# Altium PCB Copy of PCB1.PcbDoc (part 9 of 9)
Units mm, origin at the board's own origin, x right, y up, seen from the top; angles counter-clockwise.
Board outline 100 x 100 mm, 6 copper layers (Top Layer, Int1 (GND), Int2 (Sign), Int3 (Sign), Int4 (PWR), Bottom Layer), stack 1.538 mm thick; 614 components, 712 nets, 3013 pads, 501 vias.
Unrouted connection lines stored in the file: 259.
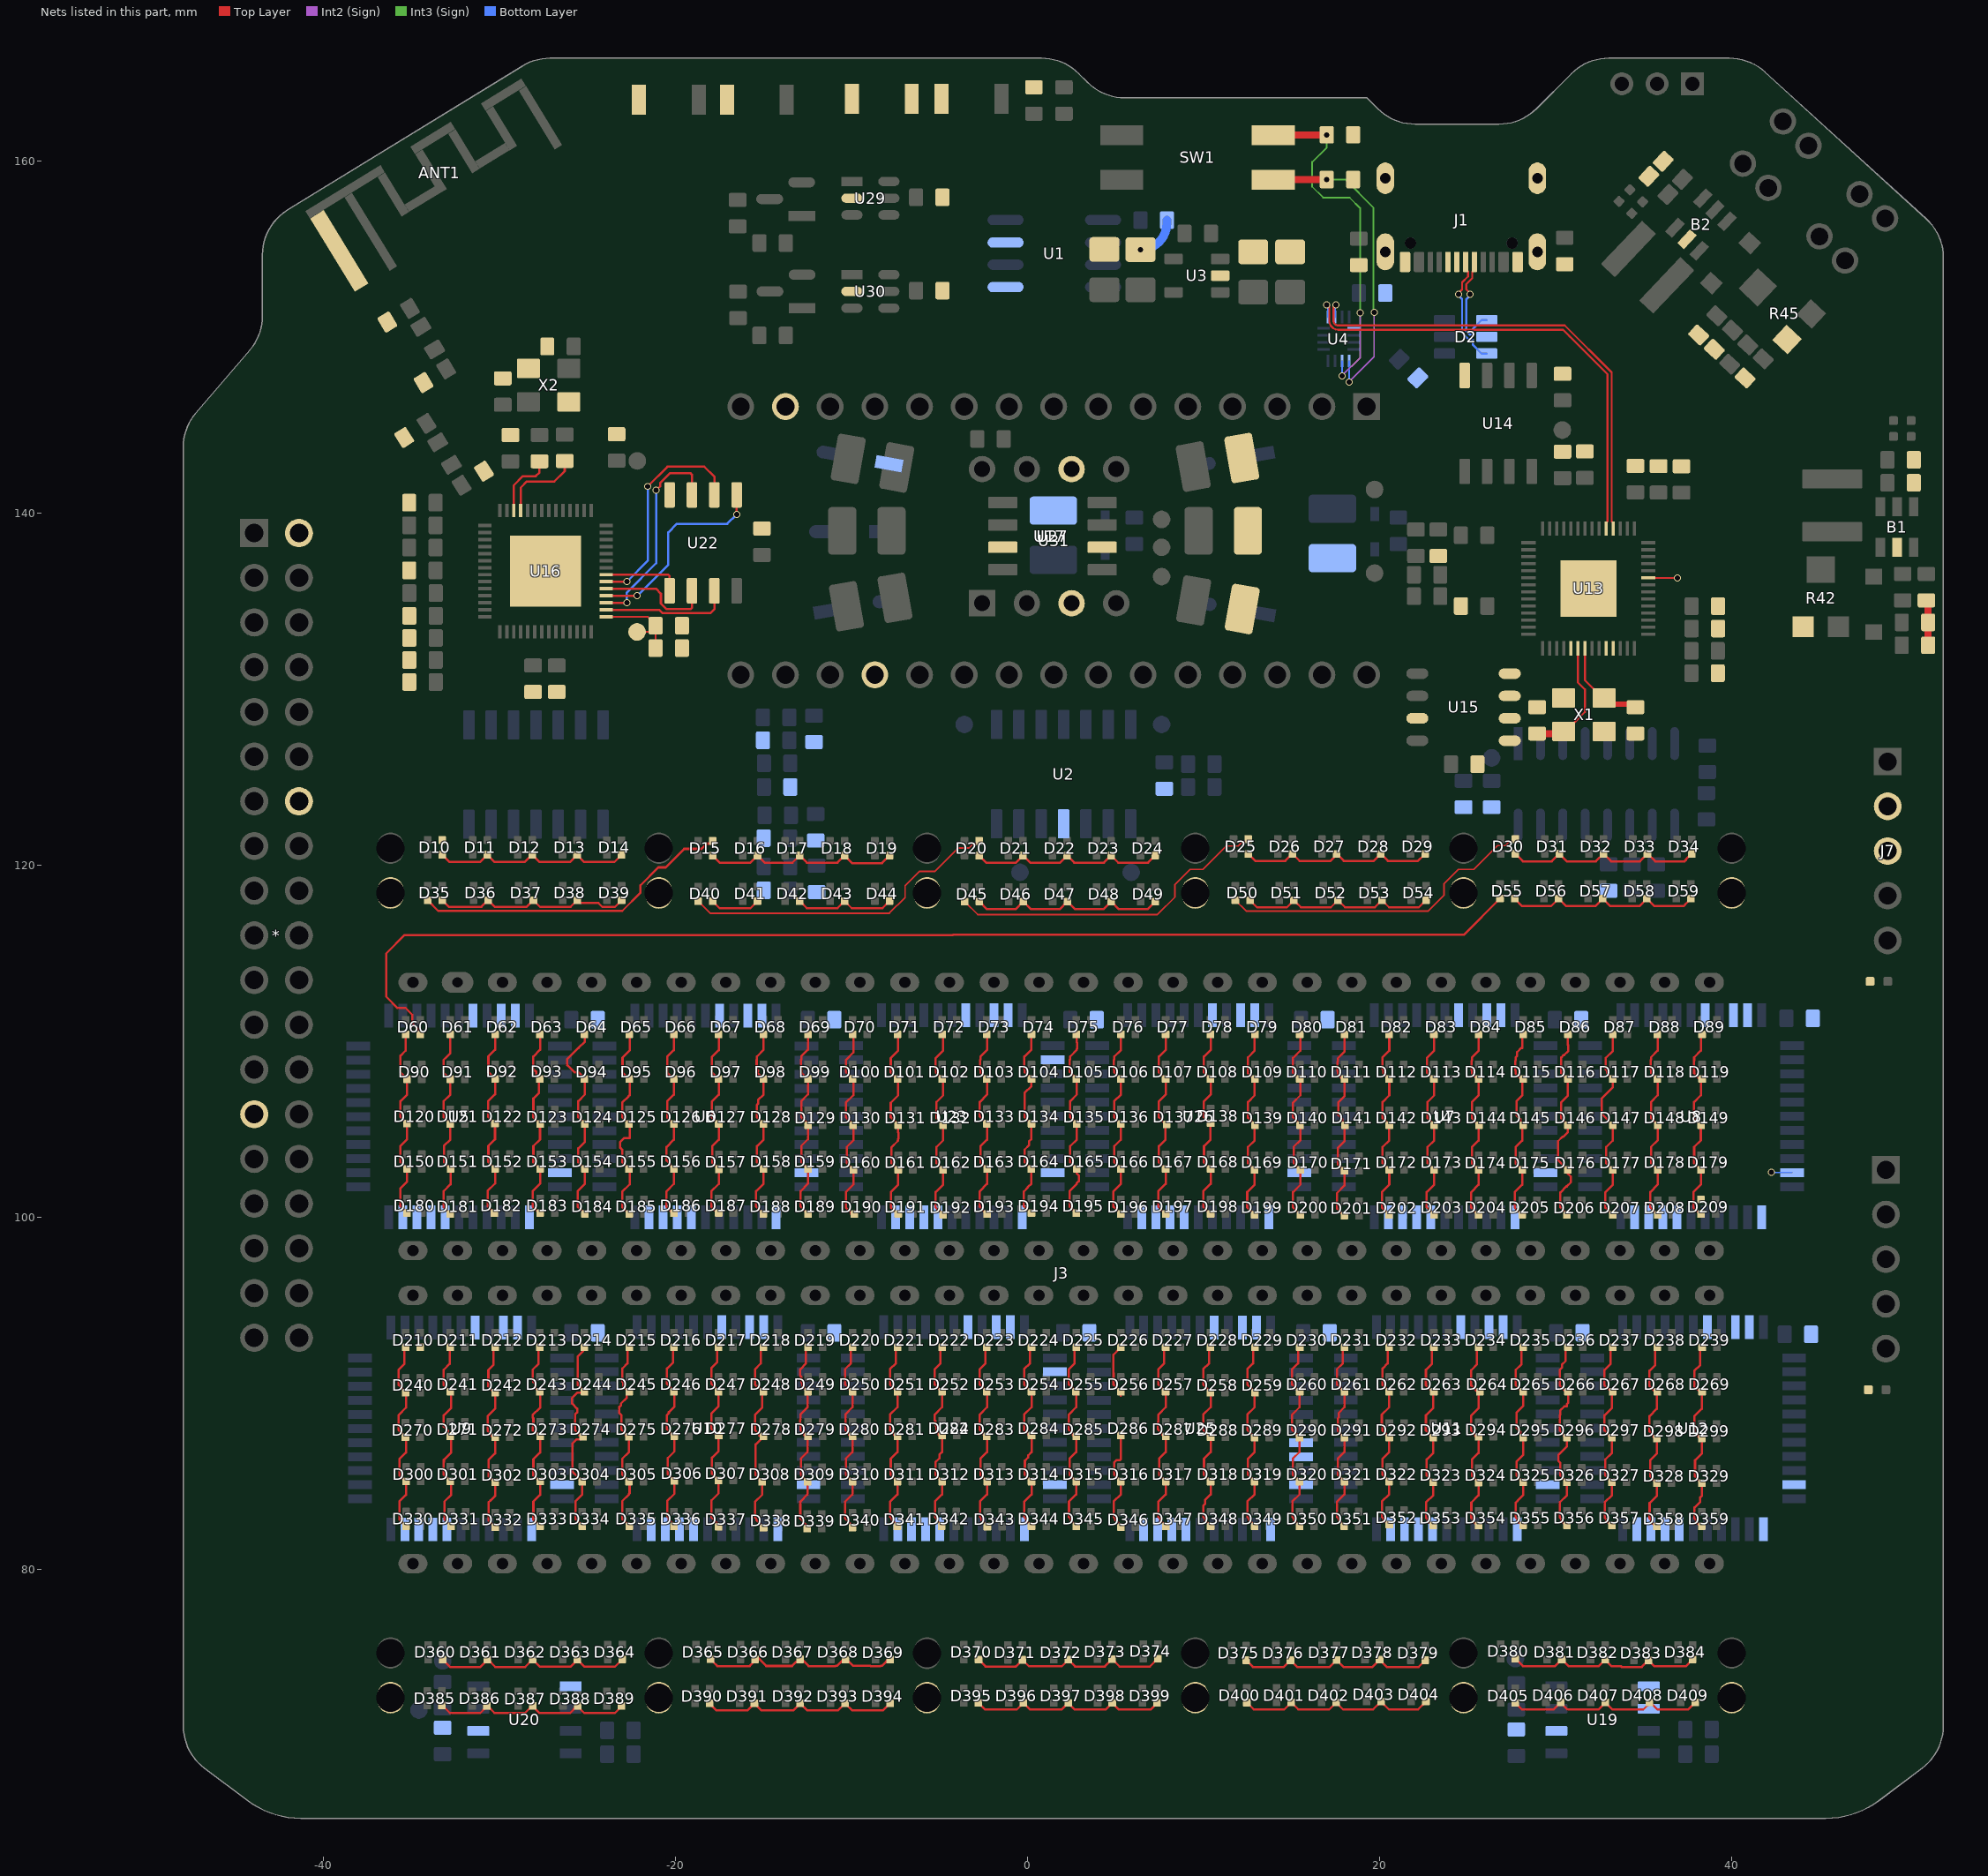
[diagram p12: the nets of this part, all layers, seen from the top]

## Via types
v1: diameter 0.4, hole 0.3, Top Layer to Bottom Layer, tented both sides, 494 vias
v2: diameter 0.4, hole 0.3, Top Layer to Bottom Layer, 5 vias
v3: diameter 0.4, hole 0.3, Top Layer to Bottom Layer, tented top, 1 vias
v4: diameter 0.6, hole 0.5, Top Layer to Bottom Layer, 1 vias

## Nets (pads, with @x,y where several pads share a name; then routed paths per layer and width w, separated by ;. In a path a pad name is that pad's centre, name@x,y a point inside that pad or via, vN(x,y) a via of type N, cw(c..) or ccw(c..) an arc to the next point about the centre after c; other vN are vias at no path point) (continued)
REF: *.2 *.14 *.27 ANT1.2 B1.2 B2.2 C1.1 C2.1 C3.1 C4.1 C5.1 C6.1 C7.1 C8.1 C9.1 C10.1 C11.1 C12.1 C13.1 C14.1 C15.1 C16.1 C17.1 C18.1 C20.1 C21.1 C23.1 C25.1 C26.1 C27.1 C28.1 C29.1 C30.1 C31.1 C32.1 C33.1 C44.1 C45.1 C46.1 C47.1 C48.1 C49.1 C50.1 C51.1 C52.1 C53.1 C54.1 C55.1 C56.1 C57.1 C58.1 C59.1 C60.1 C61.1 C62.1 C63.1 C64.1 C65.1 C66.1 C67.1 C68.1 C69.1 C70.1 C71.1 C72.1 C73.1 C74.1 C75.1 C76.1 C77.1 C78.1 C79.1 C80.1 C81.1 C82.1 C83.1 C84.1 C85.1 C86.1 D1.K D2.2 D8.1 D10.3 D11.3 D12.3 D13.3 D14.3 D15.3 D16.3 D17.3 D18.3 D19.3 D20.3 D21.3 D22.3 D23.3 D24.3 D25.3 D26.3 D27.3 D28.3 D29.3 D30.3 D31.3 D32.3 D33.3 D34.3 D35.3 D36.3 D37.3 D38.3 D39.3 D40.3 D41.3 D42.3 D43.3 D44.3 D45.3 D46.3 D47.3 D48.3 D49.3 D50.3 D51.3 D52.3 D53.3 D54.3 D55.3 D56.3 D57.3 D58.3 D59.3 D60.3 D61.3 D62.3 D63.3 D64.3 D65.3 D66.3 D67.3 D68.3 D69.3 D70.3 D71.3 D72.3 D73.3 D74.3 D75.3 D76.3 D77.3 D78.3 D79.3 D80.3 D81.3 D82.3 D83.3 D84.3 D85.3 D86.3 D87.3 D88.3 D89.3 D90.3 D91.3 D92.3 D93.3 D94.3 D95.3 D96.3 D97.3 D98.3 D99.3 D100.3 D101.3 D102.3 D103.3 D104.3 D105.3 D106.3 D107.3 D108.3 D109.3 D110.3 D111.3 D112.3 D113.3 D114.3 D115.3 D116.3 D117.3 D118.3 D119.3 D120.3 D121.3 D122.3 D123.3 D124.3 D125.3 D126.3 D127.3 D128.3 D129.3 D130.3 D131.3 D132.3 D133.3 D134.3 D135.3 D136.3 D137.3 D138.3 D139.3 D140.3 D141.3 D142.3 D143.3 D144.3 D145.3 D146.3 D147.3 D148.3 D149.3 D150.3 D151.3 D152.3 D153.3 D154.3 D155.3 D156.3 D157.3 D158.3 D159.3 D160.3 D161.3 D162.3 D163.3 D164.3 D165.3 D166.3 D167.3 D168.3 D169.3 D170.3 D171.3 D172.3 D173.3 D174.3 D175.3 D176.3 D177.3 D178.3 D179.3 D180.3 D181.3 D182.3 D183.3 D184.3 D185.3 D186.3 D187.3 D188.3 D189.3 D190.3 D191.3 D192.3 D193.3 D194.3 D195.3 D196.3 D197.3 D198.3 D199.3 D200.3 D201.3 D202.3 D203.3 D204.3 D205.3 D206.3 D207.3 D208.3 D209.3 D210.3 D211.3 D212.3 D213.3 D214.3 D215.3 D216.3 D217.3 D218.3 D219.3 D220.3 D221.3 D222.3 D223.3 D224.3 D225.3 D226.3 D227.3 D228.3 D229.3 D230.3 D231.3 D232.3 D233.3 D234.3 D235.3 D236.3 D237.3 D238.3 D239.3 D240.3 D241.3 D242.3 D243.3 D244.3 D245.3 D246.3 D247.3 D248.3 D249.3 D250.3 D251.3 D252.3 D253.3 D254.3 D255.3 D256.3 D257.3 D258.3 D259.3 D260.3 D261.3 D262.3 D263.3 D264.3 D265.3 D266.3 D267.3 D268.3 D269.3 D270.3 D271.3 D272.3 D273.3 D274.3 D275.3 D276.3 D277.3 D278.3 D279.3 D280.3 D281.3 D282.3 D283.3 D284.3 D285.3 D286.3 D287.3 D288.3 D289.3 D290.3 D291.3 D292.3 D293.3 D294.3 D295.3 D296.3 D297.3 D298.3 D299.3 D300.3 D301.3 D302.3 D303.3 D304.3 D305.3 D306.3 D307.3 D308.3 D309.3 D310.3 D311.3 D312.3 D313.3 D314.3 D315.3 D316.3 D317.3 D318.3 D319.3 D320.3 D321.3 D322.3 D323.3 D324.3 D325.3 D326.3 D327.3 D328.3 D329.3 D330.3 D331.3 D332.3 D333.3 D334.3 D335.3 D336.3 D337.3 D338.3 D339.3 D340.3 D341.3 D342.3 D343.3 D344.3 D345.3 D346.3 D347.3 D348.3 D349.3 D350.3 D351.3 D352.3 D353.3 D354.3 D355.3 D356.3 D357.3 D358.3 D359.3 D360.3 D361.3 D362.3 D363.3 D364.3 D365.3 D366.3 D367.3 D368.3 D369.3 D370.3 D371.3 D372.3 D373.3 D374.3 D375.3 D376.3 D377.3 D378.3 D379.3 D380.3 D381.3 D382.3 D383.3 D384.3 D385.3 D386.3 D387.3 D388.3 D389.3 D390.3 D391.3 D392.3 D393.3 D394.3 D395.3 D396.3 D397.3 D398.3 D399.3 D400.3 D401.3 D402.3 D403.3 D404.3 D405.3 D406.3 D407.3 D408.3 D409.3 J1.A1B12 J1.B1A12 J1.SH J3.62 J3.64 JP5.2 JP6.2 R2.2 R3.2 R5.1 R6.1 R7.1 R15.1 R23.1 R25.1 R28.1 R34.1 R42.1 R43.1 R45.1 R46.1 SW2.1 SW3.2 SW4.1 SW5.1 U1.5 U1.7 U2.11 U3.2 U4.1 U5.10 U5.12 U5.18 U5.19 U5.20 U5.21 U5.40 U5.42 U5.43 U6.10 U6.12 U6.18 U6.19 U6.20 U6.21 U6.40 U6.42 U6.43 U7.10 U7.12 U7.18 U7.19 U7.20 U7.21 U7.40 U7.42 U7.43 U8.10 U8.12 U8.18 U8.19 U8.20 U8.21 U8.40 U8.42 U8.43 U9.10 U9.12 U9.18 U9.19 U9.20 U9.21 U9.40 U9.42 U9.43 U10.10 U10.12 U10.18 U10.19 U10.20 U10.21 U10.40 U10.42 U10.43 U11.10 U11.12 U11.18 U11.19 U11.20 U11.21 U11.40 U11.42 U11.43 U12.10 U12.12 U12.18 U12.19 U12.20 U12.21 U12.40 U12.42 U12.43 U13.19 U13.57 U14.4 U15.1 U15.2 U15.3 U15.4 U15.7 U16.57 U17.3 U17.6 U19.1 U19.2 U19.6 U20.1 U20.6 U22.4 U23.2 U23.10 U23.12 U23.18 U23.19 U23.20 U23.21 U23.40 U23.42 U23.43 U24.2 U24.10 U24.12 U24.18 U24.19 U24.20 U24.21 U24.40 U24.42 U24.43 U25.10 U25.12 U25.18 U25.19 U25.20 U25.21 U25.40 U25.42 U25.43 U26.10 U26.12 U26.18 U26.19 U26.20 U26.21 U26.40 U26.42 U26.43 U27.3 U27.6 U29.2 U30.2 U31.14 U31.19 X1.2 X1.4 X2.2 X2.4 | length 911.9
  Top Layer w0.09: C1.1@14.891,154.683 14.891,154.844 C1.1@14.905,154.858 C1.1@15.106,155.059
  Top Layer w0.127: D270.3@-35.468,87.565 -35.512,87.609 -35.512,87.677 -35.743,87.908 -35.743,88.773 -35.324,89.192 -35.324,90.058 -35.743,90.477 -35.743,91.353 -35.411,91.685 D210.3@-35.411,92.606 ; D300.3@-35.449,85.021 -35.449,85.092 -35.703,85.346 -35.703,86.268 -35.324,86.647 D270.3@-35.324,87.533 ; D120.3@-35.404,105.36 -35.404,105.471 -35.639,105.706 -35.639,106.608 -35.26,106.987 D90.3@-35.26,107.853 -35.639,108.231 -35.639,109.188 -35.347,109.48 D60.3@-35.347,110.401 ; D150.3@-35.385,102.816 -35.385,102.887 -35.639,103.141 -35.639,104.063 -35.26,104.442 D120.3@-35.26,105.328 ; D330.3@-35.324,82.458 -35.703,82.836 -35.703,83.863 -35.324,84.241 D300.3@-35.324,84.968 ; D180.3@-35.26,100.253 -35.639,100.631 -35.639,101.658 -35.26,102.036 D150.3@-35.26,102.763 ; D35.3@-33.27,118.021 -32.895,117.645 -31.045,117.645 D36.3@-30.665,118.025 -30.285,117.645 -28.469,117.645 D37.3@-28.089,118.025 -27.707,117.642 -26.014,117.642 -26.011,117.645 -25.972,117.645 D38.3@-25.596,118.021 -25.445,117.869 -24.397,117.869 -24.17,117.642 -23.455,117.642 D39.3@-23.076,118.021 ; D10.3@-33.27,120.611 -32.848,120.188 -31.13,120.188 D11.3@-30.707,120.611 -30.285,120.188 -28.58,120.188 D12.3@-28.157,120.611 -27.742,120.196 -26.011,120.196 D13.3@-25.607,120.6 -25.202,120.196 -23.491,120.196 D14.3@-23.087,120.6 ; D360.3@-33.243,74.886 -32.821,74.463 -31.103,74.463 -30.68,74.886 -30.258,74.463 -28.553,74.463 D362.3@-28.13,74.886 -27.715,74.471 -25.984,74.471 -25.58,74.876 -25.175,74.471 -23.464,74.471 D364.3@-23.06,74.876 ; D385.3@-33.241,72.249 -32.837,71.845 -31.106,71.845 -30.85,72.1 D386.3@-30.814,72.1 ; D271.3@-32.904,87.56 -32.948,87.604 -32.948,87.878 -33.189,88.119 -33.189,88.647 -33.186,88.65 -33.186,88.761 -32.76,89.187 -32.76,90.053 -33.179,90.472 -33.179,90.662 -33.186,90.669 -33.186,91.197 -33.179,91.203 -33.179,91.348 -32.847,91.68 D211.3@-32.847,92.601 ; D301.3@-32.885,85.016 -32.885,85.087 -33.178,85.38 -33.178,85.558 -33.189,85.569 -33.189,86.097 -33.178,86.108 -33.178,86.224 -32.76,86.642 D271.3@-32.76,87.528 ; D181.3@-32.842,100.225 -32.842,100.235 -33.189,100.581 -33.189,101.492 -32.793,101.888 D151.3@-32.793,102.763 -33.171,103.141 -33.171,104.065 -32.81,104.426 D121.3@-32.81,105.313 -33.189,105.691 -33.189,106.601 -32.81,106.979 D91.3@-32.81,107.853 -33.189,108.231 -33.189,108.822 -33.189,108.947 -33.074,109.061 -32.807,109.328 D61.3@-32.807,110.401 ; D331.3@-32.76,82.453 -33.139,82.831 -33.139,83.858 -32.76,84.236 D301.3@-32.76,84.963 ; D386.3@-30.701,72.249 -30.297,71.845 -28.556,71.845 -28.151,72.249 -27.738,71.836 -26.014,71.836 -25.601,72.249 -25.197,71.845 -23.456,71.845 D389.3@-23.051,72.249 ; -30.646,91.147 -30.646,90.619 -30.645,90.388 -30.26,90.003 -30.26,89.137 -30.679,88.718 -30.679,87.853 -30.448,87.622 -30.448,87.554 D272.3@-30.404,87.51 ; -30.645,91.147 -30.645,91.332 -30.347,91.63 D212.3@-30.347,92.551 ; D182.3@-30.394,100.227 -30.394,100.334 -30.689,100.629 -30.689,101.503 -30.267,101.924 D152.3@-30.267,102.763 ; D302.3@-30.385,84.966 -30.385,85.037 -30.639,85.291 -30.639,86.213 -30.26,86.592 D272.3@-30.26,87.478 ; D152.3@-30.307,102.803 -30.646,103.141 -30.646,104.065 -30.271,104.44 D122.3@-30.271,105.328 -30.649,105.706 -30.649,106.617 -30.267,106.999 D92.3@-30.267,107.874 -30.646,108.252 -30.646,109.155 -30.267,109.534 D62.3@-30.267,110.401 ; D332.3@-30.26,82.403 -30.639,82.781 -30.639,83.808 -30.525,83.922 -30.517,83.922 -30.289,84.151 -30.289,84.158 -30.26,84.186 D302.3@-30.26,84.913 ; D273.3@-27.854,87.56 -27.854,87.696 -27.976,87.819 -28.039,87.819 -28.129,87.909 -28.129,88.071 -28.089,88.111 -28.089,88.595 -28.129,88.635 -28.129,88.768 -27.71,89.187 -27.71,90.053 -28.009,90.351 -28.009,90.572 -28.106,90.669 -28.106,90.741 -28.129,90.764 -28.129,91.348 -27.797,91.68 D213.3@-27.797,92.601 ; D183.3@-27.837,100.217 -27.837,100.324 -28.132,100.618 -28.132,101.493 -27.71,101.914 D153.3@-27.71,102.753 ; D303.3@-27.835,85.016 -27.835,85.087 -28.089,85.341 -28.089,86.263 -27.71,86.642 D273.3@-27.71,87.528 ; D153.3@-27.75,102.793 -28.089,103.131 -28.089,104.055 -27.714,104.43 -27.714,105.318 -27.725,105.318 -28.089,105.681 -28.089,106.757 -27.774,107.072 -27.774,107.8 D93.3@-27.714,107.86 ; D93.3@-27.727,107.874 -27.935,108.081 -27.935,108.281 -27.979,108.325 -27.991,108.325 -28.106,108.44 -28.106,108.967 -28.092,108.981 -28.092,109.142 -27.71,109.524 D63.3@-27.71,110.391 ; D333.3@-27.71,82.453 -28.089,82.831 -28.089,83.858 -27.71,84.236 D303.3@-27.71,84.963 ; D274.3@-25.454,87.59 -25.498,87.634 -25.498,87.702 -25.729,87.933 -25.729,88.798 -25.604,88.923 -25.604,89.135 -25.893,89.424 -25.893,89.748 -25.593,90.048 -25.189,90.048 -25.161,90.077 -25.567,90.482 -25.567,92.105 D214.3@-25.26,92.411 ; D304.3@-25.435,85.046 -25.462,85.073 -25.462,85.144 -25.869,85.552 -25.869,87.164 -25.64,87.393 -25.412,87.393 -25.31,87.495 D274.3@-25.31,87.558 ; D334.3@-25.31,82.483 -25.689,82.861 -25.689,83.888 -25.31,84.266 D304.3@-25.31,84.993 ; D184.3@-25.287,100.217 -25.287,100.324 -25.582,100.618 -25.582,101.493 -25.16,101.914 D154.3@-25.16,102.753 ; D154.3@-25.2,102.793 -25.539,103.131 -25.539,103.922 -25.164,104.297 -25.164,105.318 -25.542,105.696 -25.542,106.607 -25.16,106.989 -25.16,107.864 -25.542,108.245 -25.757,108.245 -26.166,108.655 -26.166,109.004 -25.54,109.63 -25.525,109.63 -25.16,109.995 D64.3@-25.16,110.391 ; D275.3@-22.804,87.59 -22.848,87.634 -22.848,87.702 -23.079,87.933 -23.079,88.758 -23.203,88.882 -23.203,89.232 -23.123,89.313 -23.123,89.416 -22.799,89.74 -22.799,89.951 -22.667,90.083 -22.66,90.083 -22.992,90.414 -22.992,90.635 -23.026,90.669 -23.026,90.676 -23.039,90.689 -23.039,91.418 -22.747,91.71 D215.3@-22.747,92.631 ; D305.3@-22.785,85.046 -22.785,85.117 -23.039,85.371 -23.039,86.293 -22.66,86.672 D275.3@-22.66,87.558 ; D185.3@-22.747,100.178 -22.747,100.284 -23.042,100.579 -23.042,101.453 -22.621,101.875 D155.3@-22.621,102.713 ; D335.3@-22.66,82.483 -23.039,82.861 -23.039,83.888 -22.66,84.266 -22.66,84.297 -22.625,84.333 -22.625,84.957 D305.3@-22.66,84.993 ; D155.3@-22.66,102.753 -23.042,103.134 -23.042,103.851 -23.154,103.963 -23.154,104.287 -22.925,104.515 -22.624,104.515 -22.624,105.278 -23.042,105.696 -23.042,106.52 -22.681,106.88 -22.681,106.888 -22.621,106.949 -22.621,107.162 -22.612,107.171 -22.612,107.495 -22.621,107.503 -22.621,107.824 -23.002,108.206 -23.002,108.363 -23.026,108.387 -23.026,109.079 -22.621,109.484 D65.3@-22.621,110.351 ; D186.3@-20.234,100.202 -20.234,100.309 -20.528,100.604 -20.528,101.478 -20.107,101.899 D156.3@-20.107,102.738 ; D276.3@-20.222,87.627 -20.266,87.671 -20.266,87.739 -20.497,87.97 -20.497,88.776 -20.395,88.878 -20.395,88.937 -20.078,89.254 -20.078,90.12 -20.497,90.538 -20.497,91.415 -20.165,91.747 D216.3@-20.165,92.668 ; D306.3@-20.203,85.083 -20.203,85.154 -20.457,85.408 -20.457,86.33 -20.078,86.709 D276.3@-20.078,87.595 ; D156.3@-20.147,102.778 -20.322,102.953 -20.322,103.036 -20.528,103.242 -20.528,103.997 -20.11,104.415 D126.3@-20.11,105.303 -20.489,105.681 -20.489,106.592 -20.107,106.974 -20.107,107.849 -20.489,108.23 -20.489,109.127 -20.107,109.509 D66.3@-20.107,110.376 ; D336.3@-20.078,82.52 -20.403,82.845 -20.403,82.934 -20.489,83.019 -20.489,83.893 -20.078,84.303 D306.3@-20.078,85.03 ; D390.3@-18.08,72.393 -17.676,71.988 -15.935,71.988 D391.3@-15.53,72.393 -15.126,71.988 -13.335,71.988 D392.3@-12.93,72.393 -12.526,71.988 -10.785,71.988 D393.3@-10.38,72.393 -9.976,71.988 -8.235,71.988 D394.3@-7.83,72.393 ; D40.3@-17.907,117.971 -17.503,117.566 -15.762,117.566 D41.3@-15.357,117.971 ; D15.3@-17.907,120.561 -17.503,120.156 -15.762,120.156 D16.3@-15.357,120.561 -14.953,120.156 -13.362,120.156 D17.3@-12.957,120.561 -12.553,120.156 -10.812,120.156 D18.3@-10.407,120.561 -9.982,120.135 -8.283,120.135 D19.3@-7.857,120.561 ; D365.3@-17.88,74.983 -17.875,74.977 -17.875,74.744 -17.637,74.506 -15.807,74.506 -15.33,74.983 -14.862,74.514 -13.399,74.514 -13.172,74.741 -13.092,74.741 -12.93,74.903 -12.93,74.983 -12.454,74.506 -10.921,74.506 -10.904,74.524 -10.839,74.524 -10.38,74.983 -9.921,74.524 -8.946,74.524 -8.914,74.491 -8.386,74.491 -8.354,74.524 -8.289,74.524 D369.3@-7.83,74.983 ; D277.3@-17.708,87.651 -17.752,87.695 -17.752,87.763 -17.983,87.994 -17.983,88.859 -17.564,89.278 -17.564,90.144 -17.983,90.563 -17.983,91.439 -17.651,91.771 D217.3@-17.651,92.692 ; D307.3@-17.689,85.107 -17.689,85.178 -17.943,85.432 -17.943,86.354 -17.564,86.733 D277.3@-17.564,87.619 ; D187.3@-17.684,100.202 -17.684,100.309 -17.978,100.604 -17.978,101.478 -17.557,101.899 D157.3@-17.557,102.738 ; D157.3@-17.597,102.778 -17.936,103.116 -17.936,104.04 -17.56,104.415 D127.3@-17.56,105.303 -17.939,105.681 -17.939,106.592 -17.557,106.974 -17.557,107.849 -17.939,108.23 -17.939,108.42 -17.946,108.427 -17.946,108.955 -17.939,108.962 -17.939,109.127 -17.557,109.509 D67.3@-17.557,110.376 ; D337.3@-17.564,82.544 -17.975,82.954 -17.975,83.917 -17.564,84.327 D307.3@-17.564,85.054 ; -15.228,87.577 -15.273,87.621 -15.273,87.689 -15.504,87.92 -15.504,88.785 -15.085,89.204 -15.085,90.16 -15.331,90.407 -15.414,90.407 -15.504,90.497 -15.504,91.365 -15.172,91.697 D218.3@-15.172,92.618 ; D308.3@-15.209,85.033 -15.236,85.06 -15.236,85.131 -15.463,85.358 -15.463,87.1 -15.085,87.478 D278.3@-15.085,87.545 ; D188.3@-15.138,100.216 -15.138,100.322 -15.433,100.617 -15.433,101.492 -15.012,101.913 D158.3@-15.012,102.751 ; D338.3@-15.085,82.47 -15.41,82.795 -15.41,82.884 -15.495,82.969 -15.495,83.843 -15.085,84.253 D308.3@-15.085,84.98 ; D158.3@-15.052,102.791 -15.39,103.13 -15.39,104.053 -15.015,104.429 -15.015,105.316 -15.024,105.316 -15.389,105.681 -15.389,106.397 -15.32,106.466 -15.32,106.68 -15.012,106.987 -15.012,107.862 -15.39,108.241 -15.39,108.255 -15.312,108.333 -15.406,108.427 -15.406,108.955 -15.39,108.97 -15.39,109.144 -15.012,109.522 D68.3@-15.012,110.389 ; D42.3@-12.957,117.971 -12.553,117.566 -10.812,117.566 D43.3@-10.407,117.971 -10.003,117.566 -8.262,117.566 D44.3@-7.857,117.971 ; D279.3@-12.656,87.582 -12.701,87.627 -12.701,87.694 -12.911,87.905 -12.911,88.295 -12.932,88.315 -12.932,88.491 -12.913,88.51 -12.913,88.809 -12.513,89.209 -12.513,90.128 -12.818,90.434 -12.818,90.58 -12.866,90.628 -12.866,90.934 -12.932,91 -12.932,91.37 -12.6,91.702 D219.3@-12.6,92.623 ; D309.3@-12.637,85.038 -12.637,85.11 -12.891,85.364 -12.891,86.286 -12.513,86.664 D279.3@-12.513,87.55 ; D189.3@-12.614,100.219 -12.614,100.325 -12.909,100.62 -12.909,101.495 -12.487,101.916 D159.3@-12.487,102.754 ; D159.3@-12.527,102.794 -12.866,103.133 -12.866,104.057 -12.491,104.432 -12.491,105.319 -12.869,105.698 -12.869,106.609 -12.487,106.991 D99.3@-12.487,107.861 -12.487,107.865 -12.866,108.244 -12.866,108.415 -12.881,108.43 -12.881,108.958 -12.866,108.973 -12.866,109.147 -12.487,109.525 D69.3@-12.487,110.392 ; D339.3@-12.513,82.475 -12.838,82.8 -12.838,82.819 -12.923,82.904 -12.923,83.848 -12.513,84.259 D309.3@-12.513,84.985 ; -10.371,82.982 -10.371,83.856 -9.96,84.266 D310.3@-9.96,84.993 ; -10.37,82.981 -10.37,82.892 D340.3@-9.96,82.483 ; D280.3@-10.104,87.59 -10.148,87.634 -10.148,87.702 -10.352,87.906 -10.352,88.825 -9.96,89.217 -9.96,90.083 -10.379,90.502 -10.379,91.378 -10.047,91.71 D220.3@-10.047,92.631 ; D310.3@-10.085,85.046 -10.085,85.117 -10.339,85.371 -10.339,86.293 -9.96,86.672 D280.3@-9.96,87.558 ; D190.3@-10.037,100.167 -10.037,100.274 -10.332,100.568 -10.332,101.443 -9.91,101.864 D160.3@-9.91,102.703 ; D160.3@-9.95,102.743 -10.289,103.081 -10.289,104.005 -9.914,104.38 -9.914,105.268 -10.332,105.686 -10.332,106.518 -9.91,106.939 -9.91,107.824 -10.099,108.012 -10.293,108.229 cw(c-10.199,108.314) -10.326,108.314 -10.326,108.955 -9.91,109.37 D70.3@-9.91,110.341 ; D281.3@-7.551,87.59 -7.595,87.634 -7.595,87.702 -7.826,87.933 -7.826,88.798 -7.407,89.217 -7.407,90.083 -7.826,90.502 -7.826,91.378 -7.494,91.71 D221.3@-7.494,92.631 ; D311.3@-7.532,85.046 -7.532,85.117 -7.786,85.371 -7.786,86.293 -7.407,86.672 D281.3@-7.407,87.558 ; D191.3@-7.487,100.167 -7.487,100.274 -7.782,100.568 -7.782,101.443 -7.36,101.864 D161.3@-7.36,102.703 ; D341.3@-7.407,82.483 -7.732,82.808 -7.732,82.897 -7.818,82.982 -7.818,83.856 -7.407,84.266 D311.3@-7.407,84.993 ; D161.3@-7.4,102.743 -7.739,103.081 -7.739,103.99 -7.395,104.333 -7.395,104.348 -7.364,104.38 -7.364,104.463 -7.345,104.482 -7.345,104.805 -7.364,104.824 -7.364,105.268 -7.786,105.69 -7.786,106.513 -7.36,106.939 -7.36,107.814 -7.786,108.239 -7.786,109.048 -7.36,109.474 D71.3@-7.36,110.341 ; D282.3@-5.011,87.59 -5.055,87.634 -5.055,87.702 -5.195,87.842 -5.195,88.118 -5.246,88.169 -5.246,88.437 -5.286,88.477 -5.286,88.798 -4.867,89.217 -4.867,90.083 -5.286,90.502 -5.286,91.378 -4.954,91.71 D222.3@-4.954,92.631 ; D312.3@-4.992,85.046 -4.992,85.117 -5.246,85.371 -5.246,86.087 -5.023,86.31 -5.023,86.516 -4.867,86.672 D282.3@-4.867,87.558 ; D192.3@-4.937,100.167 -4.937,100.274 -5.232,100.568 -5.232,101.443 -4.81,101.864 D162.3@-4.81,102.703 ; D342.3@-4.867,82.483 -5.192,82.808 -5.192,82.897 -5.278,82.982 -5.278,83.856 -4.867,84.266 D312.3@-4.867,84.993 ; D162.3@-4.85,102.743 -5.189,103.081 -5.189,104.005 -4.814,104.38 -4.814,105.268 -5.192,105.646 -5.192,106.557 -4.81,106.939 -4.81,107.814 -4.82,107.814 D102.3@-4.867,107.861 -5.019,108.012 -5.019,108.022 -5.204,108.208 -5.204,108.385 -5.246,108.427 -5.246,109.038 -4.81,109.474 D72.3@-4.81,110.341 ; D395.3@-2.8,72.416 -2.422,72.037 -0.629,72.037 D396.3@-0.25,72.416 0.128,72.037 1.921,72.037 D397.3@2.3,72.416 2.678,72.037 4.421,72.037 D398.3@4.8,72.416 5.178,72.037 6.971,72.037 D399.3@7.35,72.416 ; D370.3@-2.799,74.888 -2.4,74.489 -0.676,74.489 ; D20.3@-2.767,120.561 -2.363,120.156 -0.672,120.156 D21.3@-0.267,120.561 0.137,120.156 1.831,120.156 D22.3@2.236,120.561 2.64,120.156 4.328,120.156 D23.3@4.733,120.561 5.137,120.156 6.828,120.156 D24.3@7.233,120.561 ; D45.3@-2.754,117.949 -2.316,117.51 -0.693,117.51 D46.3@-0.254,117.949 0.184,117.51 1.807,117.51 D47.3@2.246,117.949 2.684,117.51 4.307,117.51 D48.3@4.746,117.949 5.184,117.51 6.807,117.51 D49.3@7.246,117.949 ; D283.3@-2.454,87.59 -2.498,87.634 -2.498,87.702 -2.729,87.933 -2.729,88.798 -2.31,89.217 -2.31,90.083 -2.729,90.502 -2.729,91.378 -2.397,91.71 D223.3@-2.397,92.631 ; D193.3@-2.437,100.207 -2.437,100.314 -2.732,100.608 -2.732,101.483 -2.31,101.904 D163.3@-2.31,102.743 ; D313.3@-2.435,85.046 -2.435,85.117 -2.689,85.371 -2.689,86.293 -2.31,86.672 D283.3@-2.31,87.558 ; D163.3@-2.35,102.783 -2.689,103.121 -2.689,104.045 -2.314,104.42 -2.314,105.308 -2.732,105.726 -2.732,106.558 -2.31,106.979 -2.31,107.854 -2.689,108.232 -2.689,108.41 -2.706,108.427 -2.706,108.955 -2.689,108.972 -2.689,109.135 -2.31,109.514 D73.3@-2.31,110.381 ; D343.3@-2.31,82.483 -2.635,82.808 -2.635,82.897 -2.721,82.982 -2.721,83.856 -2.31,84.266 D313.3@-2.31,84.993 ; -0.675,74.49 -0.675,74.494 D371.3@-0.302,74.868 0.074,74.491 1.926,74.491 D372.3@2.305,74.87 2.686,74.489 4.374,74.489 D373.3@4.794,74.909 5.213,74.489 6.943,74.489 D374.3@7.389,74.936 ; D284.3@0.069,87.59 0.025,87.634 0.025,87.702 -0.206,87.933 -0.206,88.798 0.213,89.217 0.213,90.083 -0.206,90.502 -0.206,91.378 0.126,91.71 D224.3@0.126,92.631 ; D194.3@0.074,100.225 0.074,100.331 -0.221,100.626 -0.221,101.475 0.007,101.703 0.007,101.728 0.2,101.922 D164.3@0.2,102.76 ; D314.3@0.088,85.046 0.088,85.117 -0.166,85.371 -0.166,86.174 0.023,86.363 0.023,86.483 0.213,86.672 D284.3@0.213,87.558 ; D164.3@0.161,102.8 -0.178,103.139 -0.178,103.854 0.071,104.103 0.071,104.311 0.197,104.438 0.197,105.325 -0.181,105.704 -0.181,107.074 0.2,107.455 0.2,107.871 -0.178,108.25 -0.178,108.421 -0.193,108.436 -0.193,109.137 0.2,109.531 D74.3@0.2,110.398 ; D344.3@0.213,82.483 -0.112,82.808 -0.112,82.897 -0.198,82.982 -0.198,83.856 0.213,84.266 D314.3@0.213,84.993 ; D285.3@2.609,87.59 2.565,87.634 2.565,87.702 2.334,87.933 2.334,88.798 2.753,89.217 2.753,90.083 2.334,90.502 2.334,91.378 2.666,91.71 D225.3@2.666,92.631 ; D315.3@2.628,85.046 2.628,85.117 2.374,85.371 2.374,86.293 2.753,86.672 D285.3@2.753,87.558 ; D195.3@2.663,100.217 2.663,100.324 2.368,100.618 2.368,101.493 2.79,101.914 2.79,101.955 2.898,102.063 2.898,102.387 2.79,102.495 D165.3@2.79,102.753 ; D165.3@2.75,102.793 2.411,103.131 2.411,104.055 2.786,104.43 2.786,105.318 2.408,105.696 2.408,106.607 2.79,106.989 2.79,107.864 2.75,107.864 2.601,108.012 2.601,108.052 2.374,108.279 2.374,108.955 2.411,108.992 2.411,109.145 2.79,109.524 2.79,109.571 2.815,109.596 2.815,109.92 2.79,109.945 D75.3@2.79,110.391 ; D345.3@2.753,82.483 2.428,82.808 2.428,82.897 2.342,82.982 2.342,83.856 2.753,84.266 D315.3@2.753,84.993 ; D196.3@5.163,100.207 5.163,100.314 4.868,100.608 4.868,101.483 5.29,101.904 D166.3@5.29,102.743 ; D316.3@5.168,85.046 5.168,85.117 4.914,85.371 4.914,86.087 5.029,86.201 5.218,86.201 5.293,86.276 D286.3@5.293,87.558 ; D226.3@5.206,92.631 5.206,92.534 4.872,92.2 4.872,91.16 4.874,91.158 4.874,90.502 5.293,90.083 5.293,89.881 ; D166.3@5.25,102.783 4.911,103.121 4.911,104.045 5.286,104.42 5.286,105.308 4.908,105.686 4.908,106.597 5.29,106.979 5.29,107.854 4.911,108.232 4.911,108.403 4.896,108.418 4.896,108.946 4.911,108.962 4.911,109.135 5.29,109.514 D76.3@5.29,110.381 ; D346.3@5.293,82.483 4.968,82.808 4.968,82.897 4.882,82.982 4.882,83.856 5.293,84.266 D316.3@5.293,84.993 ; D287.3@7.696,87.59 7.652,87.634 7.652,87.702 7.395,87.96 7.395,88.36 7.421,88.387 7.421,88.798 7.84,89.217 7.84,90.083 7.421,90.502 7.421,91.378 7.753,91.71 D227.3@7.753,92.631 ; D197.3@7.706,100.207 7.706,100.314 7.411,100.608 7.411,101.483 7.833,101.904 D167.3@7.833,102.743 ; D317.3@7.715,85.046 7.715,85.117 7.461,85.371 7.461,86.293 7.84,86.672 D287.3@7.84,87.558 ; D167.3@7.793,102.783 7.454,103.121 7.454,104.045 7.829,104.42 7.829,105.308 7.451,105.686 7.451,106.597 7.833,106.979 7.833,107.854 7.454,108.232 7.454,108.403 7.439,108.418 7.439,108.946 7.454,108.962 7.454,109.135 7.833,109.514 D77.3@7.833,110.381 ; D347.3@7.84,82.483 7.515,82.808 7.515,82.897 7.429,82.982 7.429,83.856 7.84,84.266 D317.3@7.84,84.993 ; D288.3@10.246,87.59 10.202,87.634 10.202,87.702 9.971,87.933 9.971,88.798 10.39,89.217 10.39,90.083 9.971,90.502 9.971,91.378 10.303,91.71 D228.3@10.303,92.631 ; D198.3@10.263,100.207 10.263,100.314 9.968,100.608 9.968,101.483 10.39,101.904 D168.3@10.39,102.743 ; D318.3@10.265,85.046 10.265,85.117 10.011,85.371 10.011,86.293 10.39,86.672 D288.3@10.39,87.558 ; D168.3@10.35,102.783 10.011,103.121 10.011,104.045 10.386,104.42 10.386,105.308 10.008,105.686 10.008,106.597 10.39,106.979 10.39,107.854 10.38,107.854 D108.3@10.373,107.861 10.221,108.012 10.221,108.022 10.008,108.235 10.008,108.413 9.994,108.427 9.994,108.955 10.008,108.968 10.008,109.132 10.39,109.514 D78.3@10.39,110.381 ; D348.3@10.39,82.483 10.065,82.808 10.065,82.897 9.979,82.982 9.979,83.63 10.086,83.737 10.086,83.963 10.39,84.266 D318.3@10.39,84.993 ; D375.3@12.406,74.841 12.787,74.46 14.546,74.46 D376.3@14.926,74.841 15.307,74.46 17.15,74.46 D377.3@17.545,74.855 17.94,74.46 19.58,74.46 D378.3@19.99,74.87 20.4,74.46 22.206,74.46 D379.3@22.587,74.841 ; D400.3@12.443,72.436 12.834,72.045 14.572,72.045 D401.3@14.97,72.443 15.367,72.045 17.122,72.045 D402.3@17.52,72.443 17.917,72.045 19.622,72.045 D403.3@20.07,72.493 20.517,72.045 22.172,72.045 D404.3@22.62,72.493 ; D25.3@12.523,120.661 12.924,120.26 13.927,120.26 13.931,120.256 14.631,120.256 D26.3@15.035,120.661 15.44,120.256 17.202,120.256 D27.3@17.428,120.482 ; D50.3@12.543,117.936 12.708,117.936 13.027,117.616 14.718,117.616 D51.3@15.123,118.021 ; D289.3@12.746,87.59 12.702,87.634 12.702,87.702 12.471,87.933 12.471,88.798 12.89,89.217 12.89,90.083 12.471,90.502 12.471,91.378 12.803,91.71 D229.3@12.803,92.631 ; D199.3@12.763,100.167 12.763,100.274 12.468,100.568 12.468,101.443 12.89,101.864 D169.3@12.89,102.703 ; D319.3@12.765,85.046 12.765,85.117 12.511,85.371 12.511,86.293 12.89,86.672 D289.3@12.89,87.558 ; D169.3@12.85,102.743 12.511,103.081 12.511,104.005 12.886,104.38 12.886,105.268 12.708,105.446 12.708,105.469 12.508,105.67 12.508,106.557 12.89,106.939 12.89,107.814 12.511,108.192 12.511,108.363 12.496,108.378 12.496,108.906 12.511,108.922 12.511,109.095 12.89,109.474 D79.3@12.89,110.341 ; D349.3@12.89,82.483 12.565,82.808 12.565,82.897 12.479,82.982 12.479,83.856 12.89,84.266 D319.3@12.89,84.993 ; D51.3@15.232,117.908 15.236,117.908 15.527,117.616 17.218,117.616 D52.3@17.623,118.021 ; D290.3@15.296,87.59 15.252,87.634 15.252,87.702 15.021,87.933 15.021,88.798 15.44,89.217 15.44,90.083 15.021,90.502 15.021,91.378 15.353,91.71 D230.3@15.353,92.631 ; D320.3@15.315,85.046 15.315,85.117 15.061,85.371 15.061,86.293 15.44,86.672 D290.3@15.44,87.558 ; D200.3@15.363,100.167 15.363,100.274 15.068,100.568 15.068,101.443 15.49,101.864 D170.3@15.49,102.703 ; D350.3@15.44,82.483 15.115,82.808 15.115,82.897 15.029,82.982 15.029,83.856 15.44,84.266 D320.3@15.44,84.993 ; D170.3@15.45,102.743 15.111,103.081 15.111,104.005 15.486,104.38 15.486,105.268 15.068,105.686 15.068,106.518 15.49,106.939 15.49,107.824 D110.3@15.453,107.861 15.301,108.012 15.291,108.012 15.074,108.229 15.074,109.058 15.49,109.474 D80.3@15.49,110.341 ; D27.3@17.548,120.661 17.952,120.256 19.656,120.256 19.921,120.521 D28.3@19.932,120.521 ; D52.3@17.665,117.927 17.717,117.927 18.027,117.616 19.718,117.616 D53.3@20.123,118.021 ; D291.3@17.846,87.59 17.846,87.636 17.611,87.871 17.611,88.587 17.662,88.638 17.662,88.889 17.99,89.217 17.99,90.083 17.571,90.502 17.571,91.378 17.903,91.71 D231.3@17.903,92.631 ; D201.3@17.863,100.107 17.863,100.214 17.568,100.508 17.568,101.383 17.99,101.804 D171.3@17.99,102.643 ; D321.3@17.865,85.046 17.865,85.117 17.611,85.371 17.611,86.293 17.99,86.672 D291.3@17.99,87.558 ; D171.3@17.95,102.683 17.611,103.021 17.611,103.945 17.986,104.32 17.986,105.208 17.878,105.316 17.878,105.583 17.651,105.81 17.651,106.54 17.99,106.879 17.99,107.754 17.611,108.132 17.611,108.303 17.596,108.318 17.596,108.846 17.611,108.862 17.611,109.035 17.99,109.414 D81.3@17.99,110.281 ; D351.3@17.99,82.483 17.665,82.808 17.665,82.897 17.579,82.982 17.579,83.856 17.99,84.266 D321.3@17.99,84.993 ; D28.3@20.06,120.661 20.212,120.509 20.465,120.256 22.168,120.256 22.457,120.545 D29.3@22.532,120.545 ; D53.3@20.154,117.989 20.527,117.616 22.218,117.616 D54.3@22.623,118.021 ; D292.3@20.389,87.59 20.345,87.634 20.345,87.702 20.141,87.906 20.154,87.919 20.154,88.242 20.114,88.282 20.114,88.798 20.533,89.217 D262.3@20.533,90.103 20.162,90.473 20.162,90.661 20.154,90.669 20.154,91.418 20.446,91.71 D232.3@20.446,92.631 ; D322.3@20.408,85.046 20.408,85.117 20.154,85.371 20.154,86.293 20.533,86.672 D292.3@20.533,87.558 ; D202.3@20.413,100.167 20.413,100.274 20.118,100.568 20.118,101.443 20.54,101.864 D172.3@20.54,102.703 ; D172.3@20.5,102.743 20.161,103.081 20.161,104.005 20.536,104.38 20.536,105.268 20.158,105.646 20.158,106.557 20.54,106.939 20.54,107.854 20.195,108.199 20.195,108.386 20.154,108.427 20.154,108.546 20.146,108.554 20.146,109.08 20.54,109.474 D82.3@20.54,110.341 ; D352.3@20.533,82.483 20.208,82.808 20.208,82.897 20.122,82.982 20.122,83.856 20.533,84.266 D322.3@20.533,84.993 ; D293.3@22.896,87.55 22.852,87.594 22.852,87.662 22.621,87.893 22.621,88.758 23.04,89.177 23.04,90.043 22.621,90.462 22.621,91.338 22.953,91.67 D233.3@22.953,92.591 ; D323.3@22.915,85.006 22.915,85.077 22.661,85.331 22.661,86.253 23.04,86.632 D293.3@23.04,87.518 ; D203.3@22.963,100.167 22.963,100.274 22.668,100.568 22.668,101.443 23.09,101.864 D173.3@23.09,102.703 ; D353.3@23.04,82.443 22.715,82.768 22.715,82.857 22.629,82.942 22.629,83.816 23.04,84.226 D323.3@23.04,84.953 ; D173.3@23.05,102.743 22.711,103.081 22.711,104.005 23.086,104.38 23.086,105.268 22.708,105.646 22.708,106.557 23.09,106.939 23.09,107.814 22.694,108.209 22.694,109.078 23.09,109.474 D83.3@23.09,110.341 ; D294.3@25.469,87.535 25.425,87.579 25.425,87.647 25.194,87.878 25.194,88.743 25.613,89.162 25.613,90.028 25.194,90.447 25.194,91.323 25.526,91.655 D234.3@25.526,92.576 ; D204.3@25.486,100.157 25.486,100.264 25.191,100.558 25.191,101.433 25.613,101.854 D174.3@25.613,102.693 ; D324.3@25.488,84.991 25.488,85.062 25.234,85.316 25.234,86.238 25.613,86.617 D294.3@25.613,87.503 ; D174.3@25.573,102.733 25.234,103.071 25.234,103.995 25.609,104.37 25.609,105.258 25.231,105.636 25.231,106.547 25.613,106.929 25.613,107.804 25.234,108.182 25.234,108.353 25.219,108.368 25.219,108.896 25.234,108.912 25.234,109.085 25.613,109.464 D84.3@25.613,110.331 ; D354.3@25.613,82.428 25.288,82.753 25.288,82.842 25.202,82.927 25.202,83.801 25.613,84.211 D324.3@25.613,84.938 ; D55.3@27.663,118.12 28.093,117.69 29.725,117.69 D56.3@30.155,118.12 30.585,117.69 32.238,117.69 D57.3@32.668,118.12 33.097,117.69 34.744,117.69 D58.3@35.173,118.12 35.603,117.69 37.273,117.69 37.348,117.764 37.348,117.787 D59.3@37.68,118.12 ; D405.3@27.7,72.418 28.079,72.038 29.865,72.038 D406.3@30.27,72.443 30.674,72.038 32.415,72.038 D407.3@32.82,72.443 33.224,72.038 34.965,72.038 35.37,72.443 35.774,72.038 37.515,72.038 D409.3@37.92,72.443 ; D380.3@27.703,74.931 28.127,74.507 29.961,74.507 D381.3@30.34,74.885 30.734,74.491 32.421,74.491 D382.3@32.8,74.87 33.179,74.491 33.71,74.491 33.74,74.461 34.881,74.461 D383.3@35.26,74.84 35.609,74.491 37.375,74.491 D384.3@37.77,74.886 ; D30.3@27.705,120.661 28.135,120.231 29.767,120.231 30.197,120.661 30.627,120.231 32.28,120.231 32.709,120.661 33.139,120.231 34.786,120.231 35.215,120.661 35.645,120.231 37.315,120.231 37.389,120.306 37.389,120.328 D34.3@37.722,120.661 ; D205.3@27.963,100.157 27.963,100.264 27.668,100.558 27.668,101.433 28.09,101.854 D175.3@28.09,102.693 ; D295.3@27.996,87.55 27.988,87.558 27.988,87.815 27.761,88.042 27.761,88.905 28.14,89.283 28.14,90.043 27.721,90.462 27.721,91.338 28.053,91.67 D235.3@28.053,92.591 ; D325.3@28.015,85.006 28.015,85.077 27.761,85.331 27.761,86.12 28.14,86.498 D295.3@28.14,87.518 ; D175.3@28.05,102.733 27.711,103.071 27.711,103.995 28.086,104.37 28.086,105.296 27.988,105.394 27.988,105.582 27.761,105.809 27.761,106.6 28.09,106.929 28.09,107.804 27.711,108.182 27.711,108.353 27.696,108.368 27.696,108.896 27.711,108.912 27.711,109.085 27.8,109.174 27.8,109.395 28.029,109.623 28.09,109.623 D85.3@28.09,110.331 ; D355.3@28.14,82.443 27.815,82.768 27.815,82.857 27.729,82.942 27.729,83.795 27.811,83.877 27.811,83.898 28.14,84.226 D325.3@28.14,84.953 ; D296.3@30.496,87.55 30.452,87.594 30.452,87.662 30.221,87.893 30.221,88.758 30.249,88.786 30.249,89.027 30.478,89.255 30.64,89.255 30.64,89.399 30.7,89.46 30.7,89.982 30.221,90.462 30.221,91.338 30.345,91.462 30.345,91.637 30.553,91.845 D236.3@30.553,92.591 ; D326.3@30.515,85.006 30.515,85.077 30.261,85.331 30.261,86.053 30.151,86.163 30.151,86.508 30.64,86.996 D296.3@30.64,87.518 ; D206.3@30.563,100.157 30.563,100.264 30.256,100.571 30.256,101.421 30.598,101.763 30.626,101.763 30.855,101.992 30.855,102.315 30.69,102.48 D176.3@30.69,102.693 ; D356.3@30.64,82.443 30.315,82.768 30.315,82.857 30.229,82.942 30.229,83.816 30.64,84.226 D326.3@30.64,84.953 ; D176.3@30.65,102.733 30.137,103.245 30.137,103.999 30.128,104.008 30.128,104.332 30.381,104.584 30.434,104.584 30.686,104.837 30.686,105.258 30.308,105.636 30.308,106.547 30.69,106.929 30.69,107.804 30.311,108.182 30.311,108.353 30.296,108.368 30.296,108.896 30.311,108.912 30.311,109.085 30.448,109.222 30.479,109.222 30.708,109.451 30.708,109.774 30.69,109.792 D86.3@30.69,110.331 ; D297.3@33.046,87.55 33.002,87.594 33.002,87.662 32.771,87.893 32.771,88.758 33.19,89.177 33.19,90.043 32.771,90.462 32.771,91.338 33.103,91.67 D237.3@33.103,92.591 ; D327.3@33.065,85.006 33.065,85.077 32.811,85.331 32.811,86.253 33.19,86.632 D297.3@33.19,87.518 ; D207.3@33.113,100.157 33.113,100.264 32.818,100.558 32.818,101.433 33.24,101.854 D177.3@33.24,102.693 ; D357.3@33.19,82.443 32.865,82.768 32.865,82.857 32.779,82.942 32.779,83.816 33.19,84.226 D327.3@33.19,84.953 ; D177.3@33.2,102.733 32.861,103.071 32.861,103.995 33.236,104.37 33.236,105.258 32.616,105.878 32.616,106.773 33.24,107.397 33.24,107.854 32.902,108.192 32.902,108.346 32.846,108.402 32.846,109.07 33.24,109.464 D87.3@33.24,110.331 ; D298.3@35.596,87.5 35.552,87.544 35.552,87.612 35.321,87.843 35.321,88.708 35.74,89.127 35.74,89.993 35.321,90.412 35.321,91.288 35.653,91.62 D238.3@35.653,92.541 ; D328.3@35.615,84.956 35.615,85.027 35.361,85.281 35.361,86.203 35.74,86.582 D298.3@35.74,87.468 ; D208.3@35.663,100.167 35.663,100.274 35.368,100.568 35.368,101.443 35.79,101.864 D178.3@35.79,102.703 ; D358.3@35.74,82.393 35.415,82.718 35.415,82.807 35.329,82.892 35.329,83.766 35.74,84.176 D328.3@35.74,84.903 ; D178.3@35.75,102.743 35.411,103.081 35.411,104.005 35.786,104.38 35.786,105.268 35.408,105.646 35.408,106.557 35.79,106.939 35.79,107.814 35.411,108.192 35.411,108.41 35.394,108.427 35.394,108.955 35.411,108.972 35.411,109.095 35.79,109.474 D88.3@35.79,110.341 ; D209.3@38.113,100.167 38.113,100.274 37.818,100.568 37.818,101.443 38.24,101.864 D179.3@38.24,102.703 ; D299.3@38.146,87.5 38.102,87.544 38.102,87.612 37.871,87.843 37.871,88.708 38.29,89.127 38.29,89.993 37.871,90.412 37.871,91.288 38.203,91.62 D239.3@38.203,92.541 ; D329.3@38.165,84.956 38.165,85.027 37.911,85.281 37.911,86.203 38.29,86.582 D299.3@38.29,87.468 ; D179.3@38.2,102.743 37.861,103.081 37.861,104.005 38.236,104.38 38.236,105.268 37.858,105.646 37.858,106.557 38.24,106.939 38.24,107.814 37.861,108.192 37.861,108.363 37.846,108.378 37.846,108.906 37.861,108.922 37.861,109.095 38.24,109.474 D89.3@38.24,110.341 ; D359.3@38.29,82.393 37.965,82.718 37.965,82.807 37.879,82.892 37.879,83.515 38.204,83.839 38.204,84.09 38.29,84.176 D329.3@38.29,84.903
  Top Layer w0.4: R43.1@51.055,135.058 51.155,134.958 C78.1@51.155,133.808 C77.1@51.155,132.508
  Bottom Layer w0.09: v1(42.256,102.556) U8.10@43.422,102.548
  Bottom Layer w0.5: v1(6.405,154.987) ccw(c6.405,156.487) 7.905,156.487 C45.1@7.905,156.658
RGB30_OUT_8: D209.1 D210.4
RGB_CONTROL_1: D10.4 U13.37 | length 1.6
  Top Layer w0.09: U13.37@35.26,136.335 v1(36.902,136.335)
RP_1_N: U4.14 U13.46 | length 27.7
  Top Layer w0.116: v1(17.512,151.845) ccw(c17.512,151.703) 17.37,151.703 17.37,150.949 ccw(c17.639,150.949) 17.639,150.679 30.504,150.679 33.178,148.005 33.178,139.535 33.257,139.456 U13.46@33.257,139.138
  Bottom Layer w0.116: U4.14@17.455,151.152 17.455,151.788 cw(c17.512,151.788) v1(17.512,151.845)
RP_1_P: U4.13 U13.47 | length 27.7
  Top Layer w0.116: v1(16.985,151.845) cw(c16.985,151.703) 17.127,151.703 17.127,150.949 ccw(c17.639,150.949) 17.639,150.437 30.403,150.437 30.78,150.06 32.935,147.905 32.935,139.535 32.857,139.456 U13.47@32.857,139.138
  Bottom Layer w0.116: v1(16.985,151.845) cw(c16.985,151.775) 17.055,151.775 U4.13@17.055,151.152
RP_SWCLK_5: U13.24
RP_SWDIO_5: U13.25
SEL1_2: R7.2 SW1.1 U4.5 | length 18.1
  Top Layer w0.127: SW1.1@13.95,158.949 SW1.1@15.106,158.966 ; R7.2@16.684,158.966 v1(16.984,158.968)
  Top Layer w0.4: SW1.1@15.106,158.966 R7.2@16.684,158.966
  Int2 (Sign) w0.09: v1(18.255,147.465) 19.68,148.891 v1(19.68,151.41)
  Int3 (Sign) w0.09: v1(16.984,158.968) 18.039,158.968 19.639,157.368 19.639,151.451 v1(19.68,151.41)
  Bottom Layer w0.09: v1(18.255,147.465) U4.5@18.255,148.663
SEL2_2: R6.2 SW1.2 U4.6 | length 20.4
  Top Layer w0.127: SW1.2@13.95,161.489 SW1.2@15.106,161.506 ; R6.2@16.684,161.506 v1(16.984,161.508)
  Top Layer w0.4: SW1.2@15.106,161.506 R6.2@16.684,161.506
  Int2 (Sign) w0.09: v1(17.855,147.817) 18.891,148.853 v1(18.891,151.397)
  Int3 (Sign) w0.09: v1(16.984,161.508) 16.984,160.789 16.155,159.96 16.155,158.565 16.785,157.935 18.285,157.935 18.891,157.329 v1(18.891,151.397)
  Bottom Layer w0.09: v1(17.855,147.817) U4.6@17.855,148.663
SINE_TRANG_WAV_1: J7.2 U25.8
SPI_CLK_6: U16.33 U22.6 | length 6.7
  Top Layer w0.127: U16.33@-23.952,135.718 -21.131,135.718 -20.845,135.432 -20.845,134.884 -20.515,134.554 -19.155,134.554 -19.08,134.629 U22.6@-19.08,135.602
SPI_CS0_6: U16.32 U22.1 | length 11.5
  Top Layer w0.127: U16.32@-23.952,135.318 v1(-22.2,135.318) ; v1(-16.54,139.946) U22.1@-16.54,141.052
  Bottom Layer w0.127: v1(-22.2,135.318) -22.182,135.318 -20.425,137.075 -20.425,138.918 -19.932,139.41 -17.077,139.41 v1(-16.54,139.946)
SPI_D_6: U16.35 U22.5 | length 4.5
  Top Layer w0.127: U16.35@-23.952,136.518 -20.425,136.518 -20.35,136.443 U22.5@-20.35,135.602
SPI_HD_6: U16.30 U22.7 | length 7.4
  Top Layer w0.127: U16.30@-23.952,134.518 -20.936,134.518 -20.745,134.327 -18.037,134.327 -17.81,134.554 U22.7@-17.81,135.602
SPI_Q_6: U16.34 U22.2 | length 12.6
  Top Layer w0.127: U16.34@-23.952,136.118 v1(-22.785,136.118) ; v1(-21.591,141.531) -20.471,142.65 -18.375,142.65 -17.81,142.085 U22.2@-17.81,141.052
  Bottom Layer w0.127: v1(-22.785,136.118) -21.591,137.312 v1(-21.591,141.531)
SPI_WP_6: U16.31 U22.3 | length 12
  Top Layer w0.127: U16.31@-23.952,134.918 v1(-22.785,134.918) ; v1(-21.114,141.307) -20.89,141.531 -20.89,141.725 -20.342,142.273 -19.155,142.273 -19.08,142.199 U22.3@-19.08,141.052
  Bottom Layer w0.127: v1(-22.785,134.918) -22.785,135.498 -21.114,137.169 v1(-21.114,141.307)
SQUARE_WAV_1: J7.3 U25.7
TOP1_RGB_OUT_8: D15.4 D35.1 | length 18.3
  Top Layer w0.127: D35.1@-34.1,118.021 -33.495,117.415 -23.039,117.415 -22.009,118.446 -22.009,118.87 -20.993,119.885 -20.573,119.885 -19.519,120.939 -18.547,120.939 -18.247,121.239 -18.059,121.239 D15.4@-17.907,121.391
TOP2_RGB_OUT_8: D20.4 D40.1 | length 18.3
  Top Layer w0.09: D40.1@-18.737,117.971 -18.052,117.285 -7.864,117.285 -6.973,118.176 -6.973,118.845 -6.165,119.653 -5.297,119.653 -3.964,120.986 -3.349,120.986 -3.114,121.221 -2.889,121.221 D20.4@-2.82,121.29
TOP3_RGB_OUT_8: D25.4 D45.1 | length 18.6
  Top Layer w0.09: D45.1@-3.584,117.949 -2.846,117.21 7.365,117.21 8.36,118.205 8.36,118.912 9.225,119.777 9.952,119.777 11.28,121.105 11.96,121.105 12.176,121.321 12.353,121.321 D25.4@12.523,121.491
TOP4_RGB_OUT_8: D30.4 D50.1 | length 18.2
  Top Layer w0.09: D50.1@11.793,118.021 12.406,117.408 22.75,117.408 23.641,118.299 23.641,118.953 24.465,119.777 25.338,119.777 26.692,121.131 27.131,121.131 27.354,121.353 27.568,121.353 D30.4@27.705,121.491
TOP5_RGB_OUT_8: D55.1 D60.4 | length 70.2
  Top Layer w0.127: D60.4@-34.517,110.401 -34.669,110.552 -34.669,110.74 -34.969,111.04 -34.969,111.521 -35.347,111.9 -35.805,111.9 -36.45,112.545 -36.45,114.99 -35.4,116.04 -4.26,116.04 -4.245,116.055 24.769,116.055 D55.1@26.833,118.12
USB_1_N: D2.3 J1.A6 J1.B6 | length 6.4
  Top Layer w0.116: v2(24.471,152.445) 24.471,152.515 24.677,152.721 24.677,153.126 25.009,153.458 25.009,153.732 24.881,153.86 J1.A6@24.881,154.285
  Bottom Layer w0.116: v2(24.471,152.445) 24.471,152.375 24.676,152.17 24.676,150.261 25.032,149.905 25.229,149.905 25.297,149.837 25.297,149.563 25.781,149.079 D2.3@26.081,149.079
USB_1_P: D2.1 J1.A7 J1.B7 | length 6
  Top Layer w0.116: v2(25.125,152.445) 25.125,152.515 24.919,152.721 24.919,153.025 25.252,153.358 25.252,153.732 25.381,153.86 J1.B7@25.381,154.285
  Bottom Layer w0.116: v2(25.125,152.445) 25.125,152.375 24.92,152.17 24.92,150.361 25.133,150.148 25.229,150.148 25.297,150.216 25.297,150.49 25.297,150.495 25.781,150.979 D2.1@26.081,150.979
USB_BOOT_5: R10.2 SW3.1
VDD_SPI_6: C66.2 C67.2 TP4.1 U16.29 | length 5.5
  Top Layer w0.09: U16.29@-23.952,134.118 -21.578,134.118 -21.148,133.688 C67.2@-21.148,133.617 C67.2@-21.148,133.616 ; TP4.1@-22.2,133.265 -21.499,133.265 C67.2@-21.148,133.616 ; C66.2@-21.148,132.347 C67.2@-21.148,133.616
X_IN_5: C16.2 U13.20 X1.3 | length 6.4
  Top Layer w0.127: X1.3@30.326,127.492 X1.3@30.446,127.612 ; X1.3@31.02,127.908 31.02,128.086 31.657,128.723 31.657,129.998 31.257,130.398 U13.20@31.257,132.331
  Top Layer w0.4: C16.2@28.936,127.492 X1.3@30.326,127.492
X_OUT_5: C15.2 U13.21 X1.1 | length 5.1
  Top Layer w0.127: U13.21@31.657,132.331 31.657,130.516 32.159,130.014 32.159,129.998 32.646,129.512 X1.1@32.746,129.512 X1.1@33.103,129.154 ; C15.2@34.387,129.154 C15.2@34.395,129.146
  Top Layer w0.3: X1.1@33.103,129.154 C15.2@34.387,129.154
XTAL_6_N: R37.2 U16.53 | length 4.8
  Top Layer w0.127: U16.53@-28.804,140.17 -28.804,141.008 -28.806,141.009 -28.806,141.333 -28.804,141.334 -28.804,141.461 -28.455,141.81 -26.899,141.81 -26.31,142.399 R37.2@-26.31,142.98
XTAL_6_P: L3.1 U16.54 | length 3.8
  Top Layer w0.127: U16.54@-29.204,140.17 -29.204,141.586 -28.68,142.11 -27.96,142.11 -27.745,142.325 L3.1@-27.745,142.958
pads on no net: *.1 B1.6 B2.6 D405.1 J1.A8 J1.B8 J1.MH U3.4 U4.7 U4.8 U4.9 U4.10 U4.16 U5.9 U5.22 U5.23 U5.32 U5.44 U6.9 U6.22 U6.23 U6.32 U6.44 U7.9 U7.22 U7.23 U7.32 U7.44 U8.9 U8.22 U8.23 U8.32 U8.44 U9.9 U9.22 U9.23 U9.32 U9.44 U10.9 U10.22 U10.23 U10.32 U10.44 U11.9 U11.22 U11.23 U11.32 U11.44 U12.9 U12.22 U12.23 U12.32 U12.44 U16.21 U16.22 U17.7 U21.1 U21.2 U21.7 U21.8 U21.9 U21.10 U21.15 U21.16 U23.9 U23.22 U23.23 U23.32 U23.44 U24.9 U24.22 U24.23 U24.32 U24.44 U25.9 U25.22 U25.23 U25.32 U25.44 U26.9 U26.22 U26.23 U26.32 U26.44 U27.7 U31.2 U31.12

## Polygon pours and split planes (outlines as drawn)
REF on Top Layer "NONET_L01_P010" (solid, remove dead copper, shelved, pour order 10): -54.941,140.805 -38.79,140.805 -38.79,123.705 53.355,123.705 53.355,62.175 -54.941,62.175
REF on Top Layer "NONET_L01_P009" (hatched 45Degree grid 0.4 track 0.203, remove dead copper, shelved, pour order 9): -42.615,167.455 53.43,167.965 54.12,167.275 54.12,123.665 -38.79,123.665 -38.79,140.845 -48.615,140.845 -48.615,167.68
REF on Bottom Layer "NONET_L06_P072" (solid, remove dead copper, shelved, pour order 72): -55.425,168.06 56.7,168.06 56.7,64.125 57.75,63.075 56.565,61.89 -54.63,61.89
REF on Int1 (GND) (split plane): 231 vertices, not listed, extent -47.474,66.373 51.509,165.355

## Keep-outs
Keep-Out Layer:
  lines w0.013: -47.895,71.068 ccw(c-44.895,71.068) -46.695,68.668 -44.228,66.818 ccw(c-41.228,70.818) -41.228,65.818 -40.395,65.818 45.438,65.818 ccw(c45.438,70.818) 48.438,66.818 50.905,68.668 ccw(c49.105,71.068) 52.105,71.068 52.105,130.812 52.105,145.812 52.105,154.485 ccw(c49.105,154.485) 51.124,156.704 41.963,165.038 ccw(c39.945,162.818) 39.945,165.818 33.098,165.818 ccw(c33.098,162.818) 30.976,164.94 28.984,162.947 cw(c26.862,165.068) 26.862,162.068 22.098,162.068 cw(c22.098,165.068) 19.976,162.947 19.355,163.568 5.598,163.568 cw(c5.598,166.568) 3.476,164.447 2.984,164.94 ccw(c0.862,162.818) 0.862,165.818 -27.049,165.818 ccw(c-27.049,162.818) -28.616,165.376 -41.963,157.196 ccw(c-40.395,154.638) -43.395,154.638 -43.395,151.178 cw(c-46.395,151.178) -44.117,149.226 -47.173,145.661 ccw(c-44.895,143.709) -47.895,143.709 -47.895,71.068

## Other copper
Top Layer:
  region net BUCK1_3v3: 34.457,141.128 34.457,138.756 34.878,138.756 34.878,138.335 35.025,138.335 35.025,141.129
  region net BUCK1_3v3: 34.05,140.915 37.485,140.915 37.485,141.425 34.05,141.425

## Silkscreen, mask and mechanical layers (free items; w line width, h text height)
Top Overlay:
  drawing of 10 lines, arcs and shapes, not listed
  text "5v" at 32.1,159.87 h1.2 r316.5
  text "3v3" at 31.56,159.27 h1.2 r316.5
  text "3v3" at 46.605,144.975 h1.2
  text "+1v1" at 30.833,144.248 h1.8
  text "5v" at 46.59,144.045 h1.2
Bottom Overlay:
  text "A" at -31.495,114.458 h1.8
  text "I" at -3.545,114.358 h1.8
  text "L" at 10.455,114.358 h1.8
  text "C" at 24.455,114.358 h1.8
  text "D" at 38.455,114.358 h1.8
  text "B" at -17.513,114.308 h1.8
  text "E" at -31.695,77.408 h1.8
  text "J" at -3.745,77.308 h1.8
  text "K" at 10.255,77.308 h1.8
  text "G" at 24.255,77.308 h1.8
  text "H" at 38.255,77.308 h1.8
  text "F" at -17.713,77.258 h1.8
  text "ISENSE - 1" at 35.351,67.362 h0.8
  text "ISENSE - 2" at -25.095,67.058 h0.8
Top Courtyard:
  lines w0.013: -47.887,71.056 ccw(c-44.887,71.056) -46.687,68.656 ; -47.887,71.056 ccw(c-44.887,71.056) -46.687,68.656 ; -47.887,71.056 -47.887,143.697 ; -47.887,71.056 -47.887,143.697 ; -47.887,143.697 cw(c-44.887,143.697) -47.165,145.649 ; -47.887,143.697 cw(c-44.887,143.697) -47.165,145.649 ; -47.165,145.649 -44.109,149.214 ; -47.165,145.649 -44.109,149.214 ; -46.687,68.656 -44.22,66.806 ; -46.687,68.656 -44.22,66.806 ; -44.22,66.806 ccw(c-41.22,70.806) -41.22,65.806 ; -44.22,66.806 ccw(c-41.22,70.806) -41.22,65.806 ; -44.109,149.214 ccw(c-46.387,151.166) -43.387,151.166 ; -44.109,149.214 ccw(c-46.387,151.166) -43.387,151.166 ; -43.387,151.166 -43.387,154.626 ; -43.387,151.166 -43.387,154.626 ; -43.387,154.626 cw(c-40.387,154.626) -41.955,157.184 ; -43.387,154.626 cw(c-40.387,154.626) -41.955,157.184 ; -41.955,157.184 -28.609,165.364 ; -41.955,157.184 -28.609,165.364 ; -41.22,65.806 -40.387,65.806 ; -41.22,65.806 -40.387,65.806 ; -40.387,65.806 45.446,65.806 ; -40.387,65.806 45.446,65.806 ; -28.609,165.364 cw(c-27.041,162.806) -27.041,165.806 ; -28.609,165.364 cw(c-27.041,162.806) -27.041,165.806 ; -27.041,165.806 0.87,165.806 ; -27.041,165.806 0.87,165.806 ; 0.87,165.806 cw(c0.87,162.806) 2.992,164.928 ; 0.87,165.806 cw(c0.87,162.806) 2.992,164.928 ; 2.992,164.928 3.484,164.435 ; 2.992,164.928 3.484,164.435 ; 3.484,164.435 ccw(c5.606,166.556) 5.606,163.556 ; 3.484,164.435 ccw(c5.606,166.556) 5.606,163.556 ; 5.606,163.556 19.363,163.556 ; 5.606,163.556 19.363,163.556 ; 19.363,163.556 19.984,162.935 ; 19.363,163.556 19.984,162.935 ; 19.984,162.935 ccw(c22.106,165.056) 22.106,162.056 ; 19.984,162.935 ccw(c22.106,165.056) 22.106,162.056 ; 22.106,162.056 26.87,162.056 ; 22.106,162.056 26.87,162.056 ; 26.87,162.056 ccw(c26.87,165.056) 28.992,162.935 ; 26.87,162.056 ccw(c26.87,165.056) 28.992,162.935 ; 28.992,162.935 30.984,164.928 ; 28.992,162.935 30.984,164.928 ; 30.984,164.928 cw(c33.106,162.806) 33.106,165.806 ; 30.984,164.928 cw(c33.106,162.806) 33.106,165.806 ; 33.106,165.806 39.952,165.806 ; 33.106,165.806 39.952,165.806 ; 39.952,165.806 cw(c39.952,162.806) 41.971,165.025 ; 39.952,165.806 cw(c39.952,162.806) 41.971,165.025 ; 41.971,165.025 51.132,156.692 ; 41.971,165.025 51.132,156.692 ; 45.446,65.806 ccw(c45.446,70.806) 48.446,66.806 ; 45.446,65.806 ccw(c45.446,70.806) 48.446,66.806 ; 48.446,66.806 50.913,68.656 ; 48.446,66.806 50.913,68.656 ; 50.913,68.656 ccw(c49.113,71.056) 52.113,71.056 ; 50.913,68.656 ccw(c49.113,71.056) 52.113,71.056 ; 51.132,156.692 cw(c49.113,154.473) 52.113,154.473 ; 51.132,156.692 cw(c49.113,154.473) 52.113,154.473 ; 52.113,71.056 52.113,130.8 ; 52.113,71.056 52.113,130.8 ; 52.113,130.8 52.113,145.8 ; 52.113,130.8 52.113,145.8 ; 52.113,145.8 52.113,154.473 ; 52.113,145.8 52.113,154.473
Top Assembly:
  circle w0.013: c48.905,125.927 r0.4
  circle w0.013: c48.905,92.687 r0.4
  circle w0.013: c48.905,102.847 r0.4
  circle w0.013: c48.905,100.307 r0.4
  circle w0.013: c48.905,97.767 r0.4
  circle w0.013: c48.905,95.227 r0.4
  circle w0.013: c48.905,123.387 r0.4
  circle w0.013: c48.905,120.847 r0.4
  circle w0.013: c48.905,118.307 r0.4
  circle w0.013: c48.905,115.767 r0.4
  lines w0.013: 2.53,65.806 2.53,68.806 ; -38.745,68.806 43.805,68.806 43.805,123.416 -38.745,123.416 -38.745,68.806 ; -38.745,69.06 ccw(c-38.491,69.06) -38.491,68.806 -35.57,68.806 -35.57,70.076 -37.475,71.981 -37.475,74.521 -38.745,74.521 -38.745,69.06 ; -38.745,117.701 -37.475,117.701 -37.475,120.241 -35.57,122.146 -35.57,123.416 -38.491,123.416 ccw(c-38.491,123.162) -38.745,123.162 -38.745,117.701 ; 40.63,68.806 43.551,68.806 ccw(c43.551,69.06) 43.805,69.06 43.805,74.521 42.535,74.521 42.535,71.981 40.63,70.076 40.63,68.806 ; 40.63,122.146 42.535,120.241 42.535,117.701 43.805,117.701 43.805,123.162 ccw(c43.551,123.162) 43.551,123.416 40.63,123.416 40.63,122.146
Mechanical 7:
  lines w0.013: -47.887,87.726 -47.887,107.806 ; -47.887,110.806 -47.887,130.886 ; 52.113,99.266 52.113,119.346 ; 50.305,87.727 50.305,107.807 52.105,107.807 52.105,87.727 50.305,87.727 ; 50.305,110.807 50.305,130.887 52.105,130.887 52.105,110.807 50.305,110.807